# Altium PCB SSFocuser-B-DRV8825.PcbDoc
Units mm, origin at the board's own origin, x right, y up, seen from the top; angles counter-clockwise.
Board outline 40.02 x 40.01 mm, 2 copper layers (Top Layer, Bottom Layer); 46 components, 39 nets, 205 pads, 43 vias.
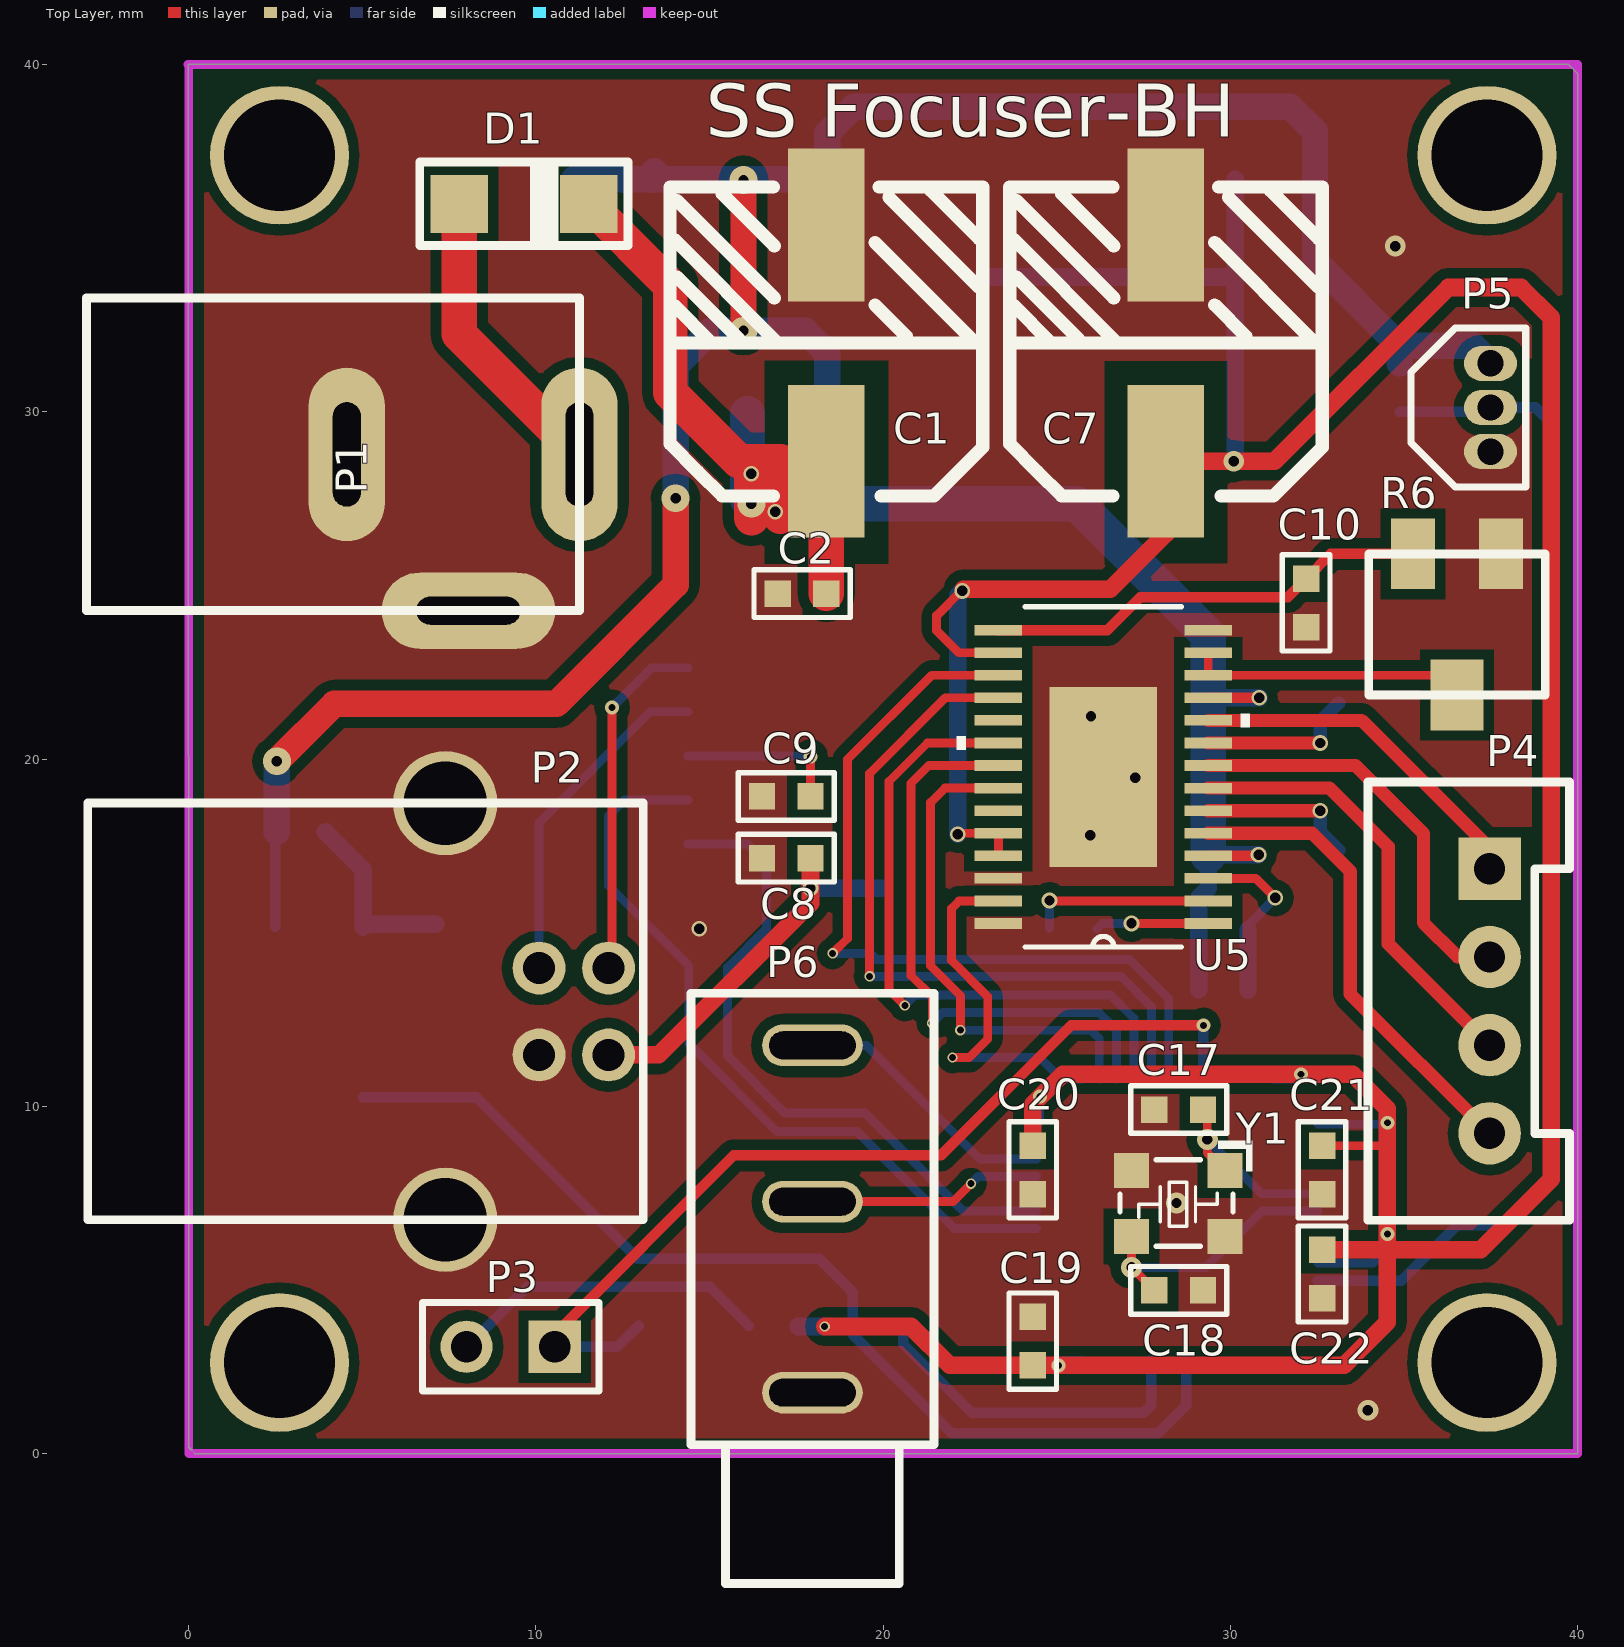
[diagram p0: Top Layer view]
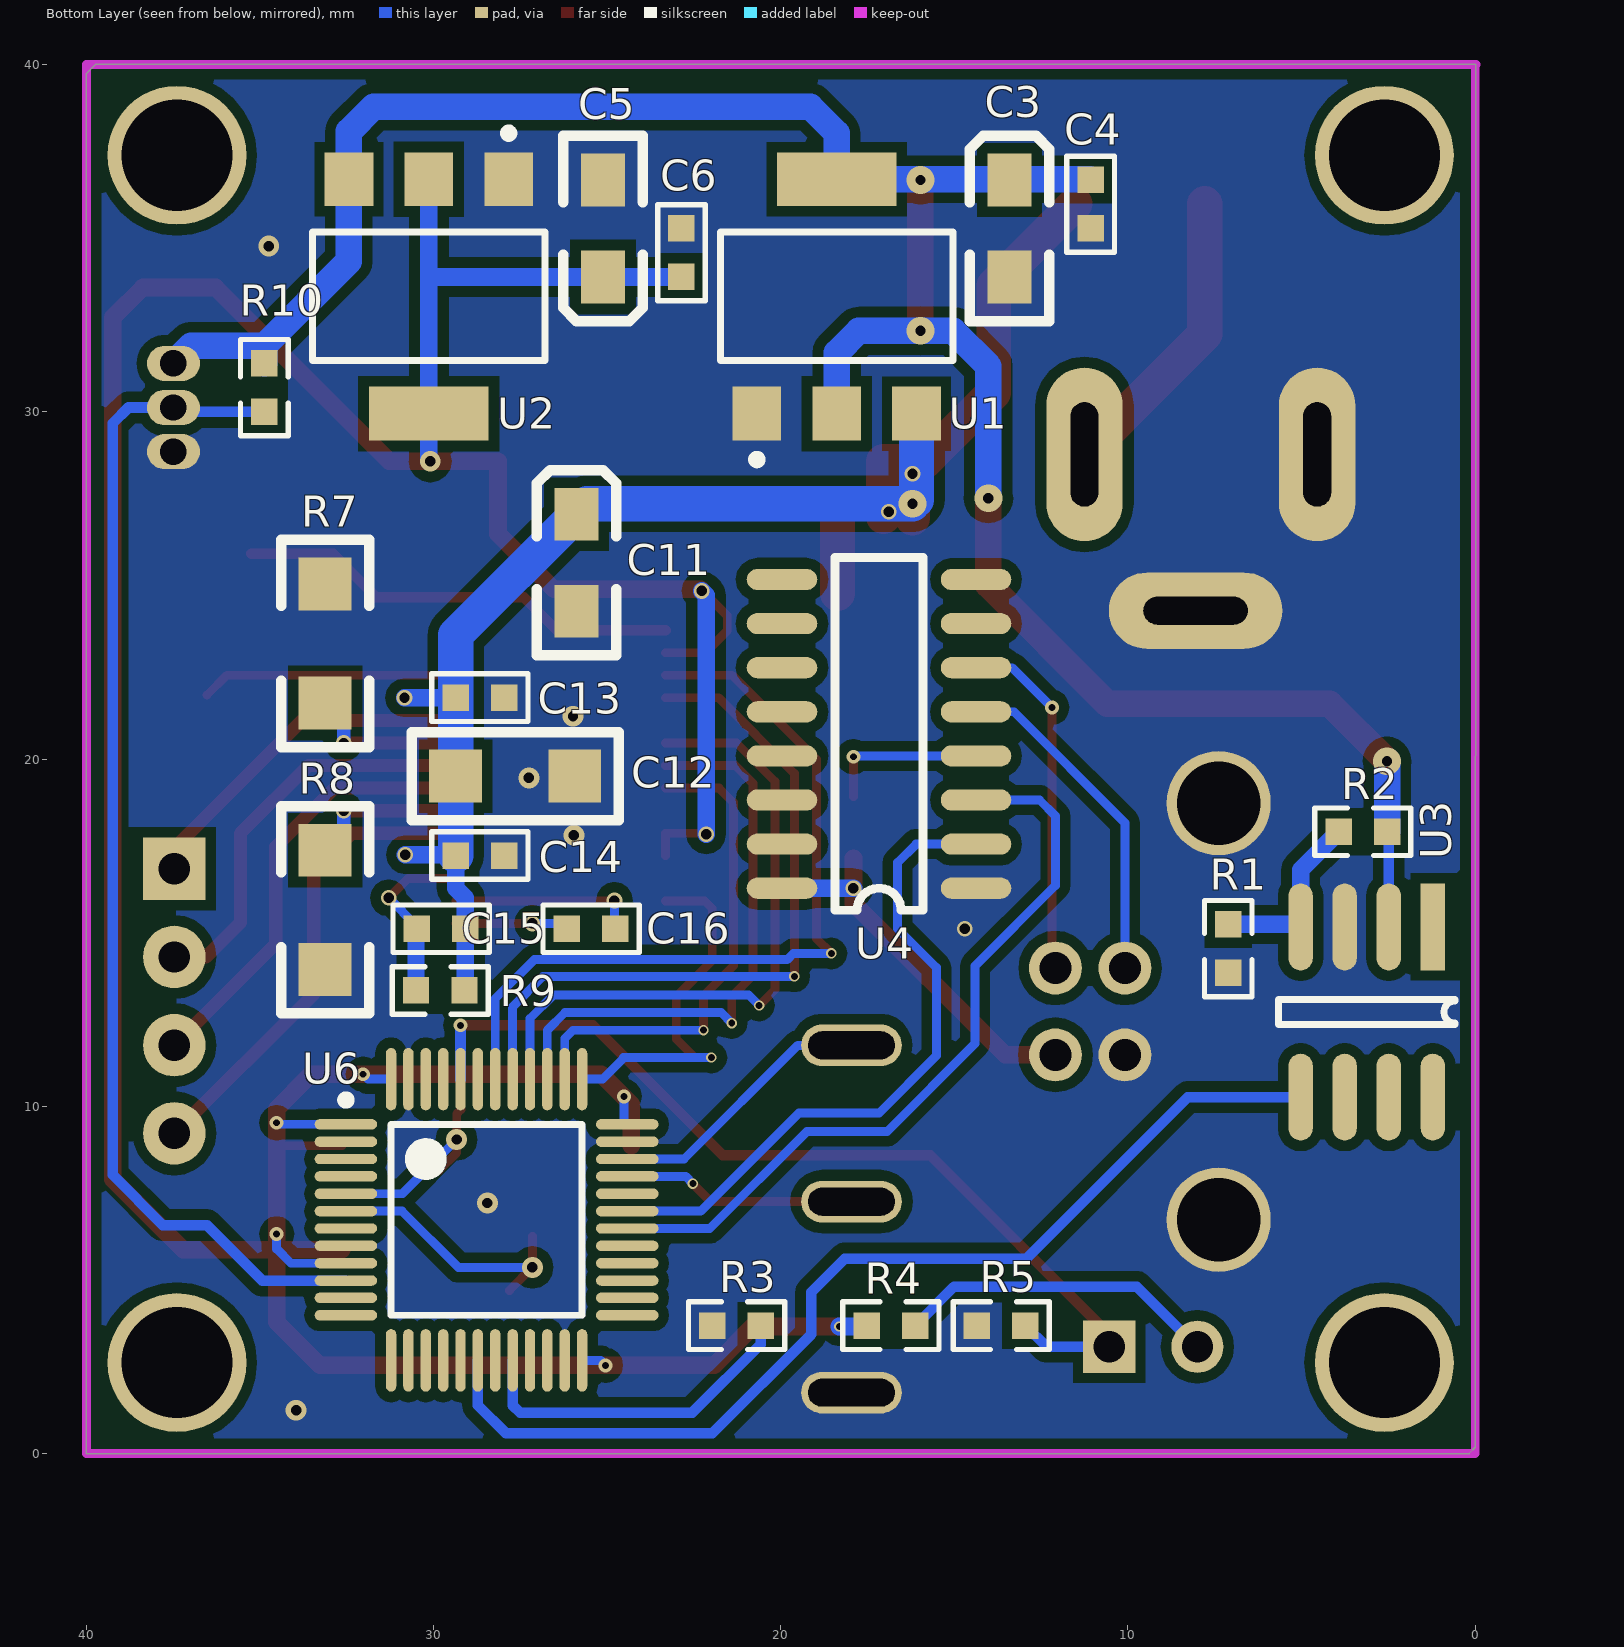
[diagram p1: Bottom Layer view, seen from below]

## Layer stack, top to bottom
Top Solder: solder mask 0.0102, Solder Resist, Dk 3.5
Top Layer: signal copper 0.0356
Dielectric1: dielectric 0.32, FR-4, Dk 4.8
Bottom Layer: signal copper 0.0356
Bottom Solder: solder mask 0.0102, Solder Resist, Dk 3.5

## Board outline
0,0.178 0.178,0 39.997,0 39.997,39.749 39.741,40.005 -0.02,40.005

## Design rules (kind name [scope] priority, off if disabled: settings)
Clearance Clearance_pyog [InPolygon] p1: gap=0.305
Clearance Clearance_mcu [InComponentClass('U7')] p2: gap=0.178
Clearance [All] p3: gap=0.178
HoleSize [All] p1: absolutevalues=TRUE maxlimit=25.4 minlimit=0.025 maxpercent=80.000 minpercent=20.000
MinimumSolderMaskSliver [All] p1: minsoldermaskwidth=0
PolygonConnect GNDVIA [IsVia] p1: connectstyle=Direct reliefconductorwidth=0.254 reliefentries=4 polygonreliefangle="90 Angle" airgapwidth=0.254
PolygonConnect [All] p2: connectstyle=Direct reliefconductorwidth=0.254 reliefentries=4 polygonreliefangle="90 Angle" airgapwidth=0.254
RoutingVias [All] p1: holewidth=0.711 width=1.27 viastyle="Through Hole" minholewidth=0.3 minwidth=0.45 maxholewidth=0.711 maxwidth=1.27
SilkToSilkClearance [All] p1: silktosilkclearance=0
SilkToSolderMaskClearance [IsPad] p1: minsilkscreentomaskgap=0 clearancetoexposedcopper=TRUE
SolderMaskExpansion [All] p1: expansion=0.102
Width [All] p1: maxlimit=1.27 minlimit=0.254 preferedwidth=0.254
25 further rules are at their usual default settings.

## Components (designator, comment, footprint, x,y, rotation, side; value= is the part's Value field where it differs from the comment)
C1 "470uF" 16V/470U(CD10X10D5) 18.364,31.979 r90 top
C2 "100nF" 0603C 16.967,24.765 r0 top
C3 "10uF" 3216 13.411,36.678 r90 bottom
C4 "100nF" 0603C 11.074,35.281 r90 bottom
C5 "10uF" 3216 25.121,33.884 r270 bottom
C6 "100nF" 0603C 22.86,35.281 r270 bottom
C7 "1000uF" 16V/470U(CD10X10D5) 28.143,31.979 r90 top
C8 "100nF" 0603C 16.51,17.145 r0 top
C9 "100nF" 0603C 16.51,18.923 r0 top
C10 "0.47uF" 0603C 32.182,23.8 r90 top
C11 "10uF" 3216 25.883,27.051 r90 bottom
C12 "4.7uF" 1206C 29.362,19.507 r180 bottom
C13 "100nF" 0603C 27.965,21.768 r0 bottom
C14 "100nF" 0603C 27.965,17.221 r0 bottom
C15 "100nF" 0603C 29.083,15.113 r0 bottom
C16 "10nF" 0603C 24.765,15.113 r0 bottom
C17 "20pF" 0603C 29.21,9.906 r180 top
C18 "20pF" 0603C 27.813,4.699 r0 top
C19 "100nF" 0603C 24.308,3.937 r270 top
C20 "100nF" 0603C 24.308,7.468 r90 top
C21 "100nF" 0603C 32.639,7.468 r90 top
C22 "100nF" 0603C 32.639,4.47 r90 top
D1 "M7" DO-214AC 9.652,35.992 r0 top
P1 "SOURCE" DC_5.5MM -2.946,33.274 r0 top locked
P2 "USB-B" USB-B 12.09,11.481 r0 top locked
P3 "BOOT0" HDR1X2 10.541,3.073 r180 top
P4 "Header 4" XH_4_V 37.465,16.84 r270 top
P5 "DS18B20" TO-92B 37.49,31.394 r270 top
P6 "PJ316" PJ316 21.463,0.254 r90 top locked
R1 "2K" 0603R 7.112,15.24 r270 bottom
R2 "4.7K" 0603R 3.937,17.907 r180 bottom
R3 "10K" 0603R 21.971,3.683 r180 bottom
R4 "4.7K" 0603R 16.129,3.683 r0 bottom
R5 "10K" 0603R 12.954,3.683 r0 bottom
R6 "RPot" VR_SMD 36.525,23.876 r180 top
R7 "0.1Ω" 1206R 33.122,25.044 r270 bottom
R8 "0.1Ω" 1206R 33.122,13.945 r90 bottom
R9 "1M" 0603R 30.505,13.335 r180 bottom
R10 "4.7K" 0603R 34.874,29.997 r90 bottom
U1 "AMS1117-5.0" SOT223 18.39,33.325 r180 bottom
U2 "AMS1117-3.3" SOT223 30.136,33.325 r0 bottom
U3 "MAX813LCSA" SOP-8 1.219,15.164 r270 bottom
U4 "CH340C" SO-16 14.376,16.281 r0 bottom
U5 "DRV8825" HTSSOP 26.34,19.488 r180 top
U6 "STM32F103C8T6" LQFP48_N 28.473,6.731 r270 bottom locked
Y1 "8MHz  无源" X3225 29.82,8.179 r180 top (schematic designator Y2)

## Footprints (in the part's own frame and the unit in brackets; to place one, negate y for a bottom-side part, rotate by r counter-clockwise, add the part's x,y. Pads: shape width x height; smd on the part's side, far side on the other; paste and mask are expansions set on the pad)
16V/470U(CD10X10D5) [mm] "取自《FE-3AD》"
  rect 4.4x2.2 smd: 1(-3.4,0) 2(3.4,0)
  Top Layer pour cut-out: -6.35,1.778 -0.508,1.778 -0.508,-1.778 -6.35,-1.778
  silkscreen extent -4.4,-4.5 4.5,4.5
0603C [mil]
  rect 30x30 smd: 1(0,0) 2(55,0)
  silkscreen extent -27,-27 82,27, body extent -4,-16 58,16, height 12
0603R [mil]
  rect 30x30 smd: 1(0,0) 2(55,0)
  silkscreen extent -27,-27 82,27, body extent -4,-18 58,16, height 18
1206C [mil]
  rect 60x60 smd: 1(0,0) 2(135,0)
  silkscreen extent -50,-50 185,50, body extent 6,-33 132,29, height 40
1206R [mil]
  rect 60x60 smd: 1(0,0) 2(135,0)
  silkscreen extent -50,-50 185,50, body extent 5,-32 131,30, height 22
3216 [mil]
  rect 60x50 smd: 1(0,0) 2(-110,0)
  silkscreen extent -160,-45 50,45, body extent -151,-35 38,36, height 73
DC_5.5MM [mm]
  oval 2.2x5 hole 0.8 slot 3 at 90 deg: 1(14.2,-4.5) 2(7.5,-4.5)
  oval 5x2.2 hole 0.8 slot 3 at 0 deg: 3(11,-9)
  silkscreen extent 0,-9 14.2,0, body extent -0.1,-8.88 14.1,-0.12, height 10.82
DO-214AC [mm]
  rect 1.655x1.67 smd: 1(1.865,0) 2(-1.865,0)
  silkscreen extent -3,-1.2 3,1.2, body extent -2.74,-1.4 2.74,1.4, height 2.3
HDR1X2 [mm] "Connector; Header; 2 Position"
  rect 1.5x1.5 hole 0.9: 1(0,0)
  round 1.5 hole 0.9: 2(2.54,0)
  silkscreen extent -1.27,-1.27 3.81,1.27, body extent -1.27,-1.27 3.81,1.27, height 7.58
HTSSOP [mil]
  rect 54x12 smd: 1(-119,166.34) 2(-119,140.75) 3(-119,115.16) 4(-119,89.57) 5(-119,63.98) 6(-119,38.39) 7(-119,12.8) 8(-119,-12.8) 9(-119,-38.39) 10(-119,-63.98) 11(-119,-89.57) 12(-119,-115.16) 13(-119,-140.75) 14(-119,-166.34) 15(119,-166.34) 16(119,-140.75) 17(119,-115.16) 18(119,-89.57) 19(119,-63.98) 20(119,-38.39) 21(119,-12.8) 22(119,12.8) 23(119,38.39) 24(119,63.98) 25(119,89.57) 26(119,115.16) 27(119,140.75) 28(119,166.34)
  rect 122.05x203.94 smd: 29(0,0)
  silkscreen extent -166,-193 166,193, body extent -133,-191 120,191, height 40
LQFP48_N [mm]
  oval 0.3x1.8 smd: 1(-2.75,-4.05) 2(-2.25,-4.05) 3(-1.75,-4.05) 4(-1.25,-4.05) 5(-0.75,-4.05) 6(-0.25,-4.05) 7(0.25,-4.05) 8(0.75,-4.05) 9(1.25,-4.05) 10(1.75,-4.05) 11(2.25,-4.05) 12(2.75,-4.05) 25(2.75,4.05) 26(2.25,4.05) 27(1.75,4.05) 28(1.25,4.05) 29(0.75,4.05) 30(0.25,4.05) 31(-0.25,4.05) 32(-0.75,4.05) 33(-1.25,4.05) 34(-1.75,4.05) 35(-2.25,4.05) 36(-2.75,4.05)
  oval 1.8x0.3 smd: 13(4.05,-2.75) 14(4.05,-2.25) 15(4.05,-1.75) 16(4.05,-1.25) 17(4.05,-0.75) 18(4.05,-0.25) 19(4.05,0.25) 20(4.05,0.75) 21(4.05,1.25) 22(4.05,1.75) 23(4.05,2.25) 24(4.05,2.75) 37(-4.05,2.75) 38(-4.05,2.25) 39(-4.05,1.75) 40(-4.05,1.25) 41(-4.05,0.75) 42(-4.05,0.25) 43(-4.05,-0.25) 44(-4.05,-0.75) 45(-4.05,-1.25) 46(-4.05,-1.75) 47(-4.05,-2.25) 48(-4.05,-2.75)
  silkscreen extent -3.57,-4.18 2.75,2.75, body extent -4.5,-4.5 4.5,4.5, height 1.5
PJ316 [mm] "PJ316"
  oval 1.2x2.9 hole 0.8 slot 2.5 at 90 deg: 1(1.5,3.5) 2(7,3.5) 3(11.5,3.5)
  silkscreen extent -4,0 13,7
SO-16 [mil]
  oval 80x24 smd: 1(0,0) 2(0,-50) 3(0,-100) 4(0,-150) 5(0,-200) 6(0,-250) 7(0,-300) 8(0,-350) 9(220,-350) 10(220,-300) 11(220,-250) 12(220,-200) 13(220,-150) 14(220,-100) 15(220,-50) 16(220,0)
  silkscreen extent 60,-375 160,25, body extent -12,-377 226,29, height 77
SOP-8 [mm]
  rect 2.5x0.7 smd: 1(0,0)
  oval 2.5x0.7 smd: 2(0,-1.27) 3(0,-2.54) 4(0,-3.81) 5(4.9,-3.81) 6(4.9,-2.54) 7(4.9,-1.27) 8(4.9,0)
  silkscreen extent 2.08,-4.45 2.82,0.63, body extent -0.56,-4.44 5.48,0.58, height 1.6
SOT223 [mm] "SOT-223/SC-73; 4 Leads; Body 6.7 x 7.3 mm, inc. leads (LxW max)"
  rect 1.4x1.55 smd: 1(-2.3,-3.375) 2(0,-3.375) 3(2.3,-3.375)
  rect 3.45x1.55 smd: 4(0,3.375)
  silkscreen extent -3.35,-4.82 3.35,1.85, body extent -3.25,-3.53 3.25,3.43, height 1.7
TO-92B [mil]
  oval 40x60 hole 30: 1(0,0) 2(50,0) 3(100,0)
  silkscreen extent -40,-90 140,40
USB-B [mm]
  round 1.524 hole 0.92: 1(0,0) 2(0,2.5) 3(-2,2.5) 4(-2,0)
  round 3 hole 2.4: 5(-4.7,7.25) 6(-4.7,-4.75)
  silkscreen extent -15,-4.75 1,7.25
VR_SMD [mil]
  rect 50x80 smd: 1(-50,-80) 2(50,-80)
  rect 60x80 smd: 3(0,80)
  silkscreen extent -100,-80 100,80
X3225 [mm]
  rect 1x1 smd: 1(-0.025,0.025) 2(2.667,0.025) 3(2.667,1.93) 4(-0.025,1.93)
  silkscreen extent -0.81,-0.84 3,2.21, body extent -0.23,-0.29 2.97,2.21, height 0.72
XH_4_V [mm]
  rect 1.8x1.8 hole 0.9: 1(0,0)
  round 1.8 hole 0.9: 2(2.54,0) 3(5.08,0) 4(7.62,0)
  silkscreen extent -2.5,-3.5 10.12,2.3, body extent -2.39,-3.35 10.01,2.75, height 7

## Part data
C1: library part C470UF016S, "470UF      16V      CD10X10D5"
C2 C4 C6 C8 C10 C12 C13 C14 C15 C16 C17 C18 C19 C20 C21 C22: library part Cap, "Capacitor"
C3 C5 C7 C11: library part CAP2
C9: library part C
D1: library part Diode, "High Conductance Fast Diode"
P3: library part MHDR1X2, "Header, 2-Pin"
P4: "Header, 4-Pin"
P5: library part "Header 3", "Header, 3-Pin"
R1 R2 R5 R7 R8 R10: library part RES, "Resistor"
R3 R4 R9: library part R
R6: "Potentiometer"
U1 U2: library part AMS1117
U3: library part MAX813L
U4: library part CH340G, "USB2UART"
U6: "STM32 ARM-based 32-bit MCU Performance Line with 64 kB Flash, 20 kB Internal RAM, -40 to +85癈 Temperature, 48-Pin LQFP, Tray"
Y1: library part XTAL_1, "Crystal Oscillator"

## Free pads (board coordinates)
  round 4 hole 3.2: 0(2.616,2.616) 1(37.389,2.616) 2(37.389,37.389) 3(2.616,37.389)

## Via types
v1: diameter 0.45, hole 0.3, Top Layer to Bottom Layer, 13 vias
v2: diameter 0.6, hole 0.3, Top Layer to Bottom Layer, 9 vias
v3: diameter 0.4, hole 0.2, Top Layer to Bottom Layer, 8 vias
v4: diameter 0.3, hole 0.2, Top Layer to Bottom Layer, 8 vias
v5: diameter 0.8, hole 0.3, Top Layer to Bottom Layer, 5 vias

## Nets (pads, with @x,y where several pads share a name; then routed paths per layer and width w, separated by ;. In a path a pad name is that pad's centre, name@x,y a point inside that pad or via, vN(x,y) a via of type N, cw(c..) or ccw(c..) an arc to the next point about the centre after c; other vN are vias at no path point)
A1: P4.4 U5.5 | length 13.8
  Top Layer w0.381: U5.5 32.353,17.863 33.452,16.764 33.452,13.233 P4.4
A2: P4.3 U5.7 | length 12.8
  Top Layer w0.381: U5.7 32.856,19.163 34.544,17.475 34.544,14.681 P4.3
B1: P4.1 U5.10 | length 10.2
  Top Layer w0.381: U5.10 33.776,21.113 37.465,17.424 P4.1
B2: P4.2 U5.8 | length 11.9
  Top Layer w0.381: U5.8 33.603,19.813 35.56,17.856 35.56,15.291 36.551,14.3 P4.2
BOOT0: P3.1 R5.1 U6.44 | length 26.9
  Top Layer w0.305: P3.1 10.541,3.429 15.697,8.585 21.666,8.585 25.413,12.332 v3(29.223,12.332)
  Bottom Layer w0.305: P3.1 12.344,3.073 R5.1 ; U6.44 v3(29.223,12.332)
BOOT1: R3.2 U6.20 | length 9.9
  Bottom Layer w0.305: R3.2 20.574,3.15 22.555,1.168 27.508,1.168 27.723,1.384 U6.20
D3V3: C5.1 C6.2 C7.1 C19.2 C20.2 C21.2 C22.2 R4.2 U2.2 U2.4 U5.16 U5.24 U5.25 U6.1 U6.9 U6.24 U6.36 U6.48 | length 127.3
  Top Layer w0.254: v1(22.149,17.831) 22.181,17.863 U5.24 ; v1(22.276,24.841) 22.25,24.841 21.539,24.13 21.539,23.698 22.174,23.063 U5.16 ; U5.25 U5.24@23.317,17.798 ; C21.2 34.519,8.865
  Top Layer w0.508: v4(18.313,3.658) 20.803,3.658 21.92,2.54 C19.2 v3(25.044,2.54) 33.274,2.54 34.519,3.785 34.519,5.867 ; v1@22.301,24.892 26.543,24.892 28.143,26.492 C7.1 v2(30.095,28.579) 31.271,28.579 36.271,33.579 38.379,33.579 39.243,32.715 39.243,7.899 37.211,5.867 34.519,5.867 ; C20.2 24.308,10.058 25.171,10.922 v3(32.029,10.922) 33.528,10.922 34.519,9.931 v3(34.519,9.525) 34.519,8.865 v3(34.519,6.325) 34.519,5.867 ; C22.2 34.519,5.867
  Bottom Layer w0.254: U6.36 24.511,9.569 v3(24.511,10.287) ; v3(25.044,2.54) 25.185,2.681 U6.24 ; U6.48 31.888,10.781 v3(32.029,10.922) ; U6.9 34.107,5.481 34.519,5.893 v3(34.519,6.325) ; U6.1 34.475,9.481 v3(34.519,9.525)
  Bottom Layer w0.508: R4.2@17.551,3.658 v4(18.313,3.658) ; v1(22.149,17.831) 22.149,24.714 v1(22.276,24.841) ; C6.2 C5.1 30.11,33.884 30.136,33.909 ; v2@30.136,28.586 U2.4 30.136,33.909 ; U2.2 30.136,33.909
D5V0: C3.1 C4.2 P5.1 R2.2 R10.2 U1.2 U1.4 U2.3 U3.2 | length 69.8
  Top Layer w0.762: v5(2.54,19.939) 4.191,21.59 10.592,21.59 14.021,25.019 v5(14.021,27.508) ; v5(15.977,32.334) v5(15.977,36.678)
  Bottom Layer w0.3: U3.2 R2.2@2.489,17.856
  Bottom Layer w0.762: R2.2 v5(2.54,19.939) ; C4.2@11.097,36.7 C3.1@13.411,36.7 ; C3.1 C3.1@13.411,36.7 ; C3.1@13.411,36.932 C3.1@13.411,36.7 ; v5(14.021,27.508) 14.021,31.318 15.037,32.334 v5(15.977,32.334) 17.755,32.334 18.39,31.699 U1.2 ; R10.2 34.874,31.902 ; P5.1 36.982,31.902 34.874,31.902 ; C3.1@13.411,36.7 U1.4 18.39,38.024 19.152,38.786 31.725,38.786 32.436,38.075 U2.3 32.436,34.341 34.874,31.902
D12V0: C1.1 C2.2 C11.1 C12.1 C13.2 C14.2 C15.1 D1.1 R9.2 U1.3 U5.4 U5.11 | length 49
  Top Layer w0.3: U5.4 v1@30.81,17.213 ; U5.11 v1@30.836,21.763
  Top Layer w1: D1.1 13.868,33.64 13.868,30.556 15.846,28.579 17.043,28.579 v1@17.043,26.975
  Top Layer w1.016: 16.205,26.949 v1(16.205,28.219) ; C2.2 C1.1@18.364,27.026
  Bottom Layer w0.5: R9.2@29.083,13.36 C15.1 29.083,16.002 29.362,16.281 C14.2 ; C13.2 v1(30.836,21.768) ; C14.2@29.388,17.247 v1(30.81,17.247)
  Bottom Layer w1.016: U1.3 16.09,27.471 v5(16.205,27.356) 25.578,27.356 C11.1 29.362,23.571 C13.2 C12.1 C14.2
  other v1: 16.891,27.127
DIR: U5.20 U6.40 | length 19
  Top Layer w0.254: v4(20.625,12.903) 20.168,13.36 20.168,19.355 21.276,20.463 U5.20
  Bottom Layer w0.254: v4(20.625,12.903) 20.93,13.208 26.543,13.208 27.223,12.528 U6.40
DOWN: P6.3 U6.34 | length 7.8
  Bottom Layer w0.254: P6.3 19.513,11.754 22.786,8.481 U6.34
EN: U5.21 U6.39 | length 16.9
  Top Layer w0.254: v4(21.412,12.395) 21.412,13.157 20.803,13.767 20.803,19.304 21.312,19.813 U5.21
  Bottom Layer w0.254: v4(21.412,12.395) 21.717,12.7 26.213,12.7 26.723,12.189 U6.39
FLT: U5.18 U6.41 | length 21
  Top Layer w0.254: v4(19.609,13.741) 19.609,19.583 21.789,21.763 U5.18
  Bottom Layer w0.254: v4(19.609,13.741) 26.848,13.741 27.723,12.866 U6.41
GND: C1.2 C2.1 C3.2 C4.1 C5.2 C6.1 C7.2 C8.1 C9.1 C10.1 C11.2 C12.2 C13.1 C14.1 C17.2 C18.2 C19.1 C20.1 C21.1 C22.1 P1.2 P1.3 P2.4 P2.5 P2.6 P5.3 P6.1 R1.2 R3.1 R5.2 R6.1 R7.1 R8.1 U1.1 U2.1 U3.3 U4.1 U5.14 U5.26 U5.28 U5.29 U6.8 U6.23 U6.35 U6.47 Y1.2 Y1.4
  other v1: 14.707,15.113
  other v2: 33.96,1.245 28.448,7.214 25.959,17.805 27.254,19.456 25.984,21.234 34.747,34.773
HOME: U5.27 U6.37 | length 10.9
  Top Layer w0.254: v4(21.996,11.405) 22.479,11.405 23.012,11.938 23.012,13.157 21.971,14.199 21.971,15.697 22.187,15.913 U5.27
  Bottom Layer w0.254: v4(21.996,11.405) 24.536,11.405 ; 24.524,11.392 25.135,10.781 U6.37
NetC9_2: C9.2 U4.4 | length 4.6
  Top Layer w0.254: C9.2 v3(17.907,20.066)
  Bottom Layer w0.254: U4.4 v3@17.882,20.091
NetC15_2: C15.2 R9.1 U5.3 | length 5.1
  Top Layer w0.254: U5.3 30.732,16.563 v1(31.293,16.002)
  Bottom Layer w0.254: C15.2 30.48,15.189 v1(31.293,16.002)
  Bottom Layer w0.5: R9.1 C15.2@30.505,15.088
NetC16_1: C16.1 U5.2 | length 5.4
  Top Layer w0.254: v1@24.79,15.913 U5.2
  Bottom Layer w0.254: C16.1@24.79,15.138 v1(24.79,15.926)
NetC16_2: C16.2 U5.1 | length 3.3
  Top Layer w0.254: v1(27.153,15.265) 27.155,15.263 U5.1
  Bottom Layer w0.254: C16.2 26.314,15.265 v1(27.153,15.265)
NetD1_1: D1.2 P1.1 | length 8.7
  Top Layer w1.016: D1.2 7.787,32.241 P1.1
NetP2_2: P2.2 U4.6 | length 10.3
  Top Layer w0.254: P2.2 12.192,14.082 v3(12.192,21.488)
  Bottom Layer w0.254: v3@12.141,21.438 v3(12.192,21.488) 13.335,22.631 U4.6
NetP2_3: P2.3 U4.5 | length 9.8
  Bottom Layer w0.254: P2.3 10.09,18.168 13.284,21.361 U4.5
NetP3_2: P3.2 R4.1 | length 9.3
  Bottom Layer w0.3: P3.2@8.026,3.073 9.754,4.801 15.011,4.801 R4.1
NetR1_1: R1.1 R2.1 U3.4 | length 5.2
  Bottom Layer w0.508: R2.1 5.029,16.815 U3.4 ; U3.4@5.105,15.24 R1.1
NetR6_3: R6.3 U5.12 U5.13 | length 8
  Top Layer w0.254: U5.13 U5.12 35.956,22.413 R6.3
NetR7_2: R7.2 U5.9 | length 4.6
  Top Layer w0.381: U5.9 v1(32.588,20.463)
  Bottom Layer w0.381: v1(32.588,20.463) 32.588,21.082 R7.2
NetR8_2: R8.2 U5.6 | length 4.6
  Top Layer w0.381: U5.6 v1(32.585,18.513)
  Bottom Layer w0.381: v1(32.585,18.513) 32.585,17.91 R8.2
OSC_IN: C17.1 U6.5 Y1.1 | length 5.8
  Top Layer w0.254: C17.1 29.332,9.784 29.332,8.666 Y1.1
  Bottom Layer w0.254: v2(29.337,9.042) 30.898,7.481 U6.5
OSC_OUT: C18.1 U6.6 Y1.3 | length 7.9
  Top Layer w0.254: Y1.3 v2(27.153,5.359) C18.1
  Bottom Layer w0.254: v2(27.153,5.359) 29.286,5.359 30.908,6.981 U6.6
PFO: U3.5 U6.18 | length 30
  Bottom Layer w0.305: U3.5 8.278,10.264 12.929,5.613 18.161,5.613 19.126,4.648 19.126,3.429 21.971,0.584 27.915,0.584 28.723,1.393 U6.18
RESET: U6.7
RXD: U4.3 U6.30 | length 22.2
  Bottom Layer w0.254: U4.3 12.548,18.821 12.09,18.364 12.09,16.358 14.402,14.046 14.402,11.811 16.942,9.271 19.253,9.271 22.043,6.481 U6.30
SLP: U5.17 U6.42 | length 23.7
  Top Layer w0.254: v4(18.542,14.402) 18.974,14.834 18.974,19.991 21.396,22.413 U5.17
  Bottom Layer w0.254: v4(18.542,14.402) 19.634,14.402 19.812,14.224 27.102,14.224 28.223,13.102 U6.42
STEP: U5.22 U6.38 | length 14.3
  Top Layer w0.254: v4(22.225,12.192) 22.225,13.183 21.361,14.046 21.361,18.745 21.779,19.163 U5.22
  Bottom Layer w0.254: v4(22.225,12.192) 25.984,12.192 26.223,11.953 U6.38
TEMP: P5.2 R10.1 U6.10 | length 34.2
  Bottom Layer w0.305: U6.10@32.523,4.978 34.925,4.978 36.525,6.579 37.795,6.579 39.243,8.026 39.243,29.667 38.786,30.124 P5.2 37.363,29.997 R10.1
TXD: U4.2 U6.31 | length 19.3
  Bottom Layer w0.254: U4.2 16.104,17.551 16.637,17.018 16.637,15.113 15.519,13.995 15.519,11.455 17.17,9.804 19.482,9.804 22.305,6.981 U6.31
UP: P6.2 U6.33 | length 6.8
  Top Layer w0.254: P6.2 22.011,7.254 v4(22.53,7.772)
  Bottom Layer w0.254: v4(22.53,7.772) 22.738,7.981 U6.33
V3.3: C10.2 R6.2 U5.15 | length 12.8
  Top Layer w0.305: U5.15 26.456,23.713 27.407,24.663 31.648,24.663 C10.2 32.893,25.908 R6.2
VBUS: C8.2 P2.1 U4.16 | length 11
  Top Layer w0.508: P2.1 13.538,11.481 17.907,15.85 v1(17.907,16.281) C8.2
  Bottom Layer w0.508: v1(17.907,16.281) U4.16
pads on no net: U3.1 U3.6 U3.7 U3.8 U4.7 U4.8 U4.9 U4.10 U4.11 U4.12 U4.13 U4.14 U4.15 U5.19 U5.23 U6.2 U6.3 U6.4 U6.11 U6.12 U6.13 U6.14 U6.15 U6.16 U6.17 U6.19 U6.21 U6.22 U6.25 U6.26 U6.27 U6.28 U6.29 U6.32 U6.43 U6.45 U6.46

## Polygon pours and split planes (outlines as drawn)
GND on Top Layer "Bottom Layer-No Net" (solid, remove dead copper, pour order 40): 0,0 39.997,0 39.997,40.005 -0.02,40.005
GND on Bottom Layer "Bottom Layer-No Net" (solid, remove dead copper, pour order 42): 0.089,0.089 39.908,0.089 39.997,0 39.997,40.005 0,40.005

## Keep-outs
Keep-Out Layer:
  lines w0.254: -0.02,40.005 39.997,40.005 39.997,0 0,0 0,40.005

## Silkscreen, mask and mechanical layers (free items; w line width, h text height)
Top Overlay:
  text "SS Focuser-BH" at 14.884,37.922 h1.52

## Dimensions
39.997,40.005 to 39.997,0 on Top Overlay
0,0 to 39.997,0 on Top Overlay